# Altium PCB PCB.PcbDoc
Units mil, origin at the board's own origin, x right, y up, seen from the top; angles counter-clockwise.
Board outline 2045 x 1355 mil, 4 copper layers (Top Layer, Layer 1, Layer 2, Bottom Layer), stack 60.91 mil thick; 44 components, 32 nets, 142 pads, 72 vias.
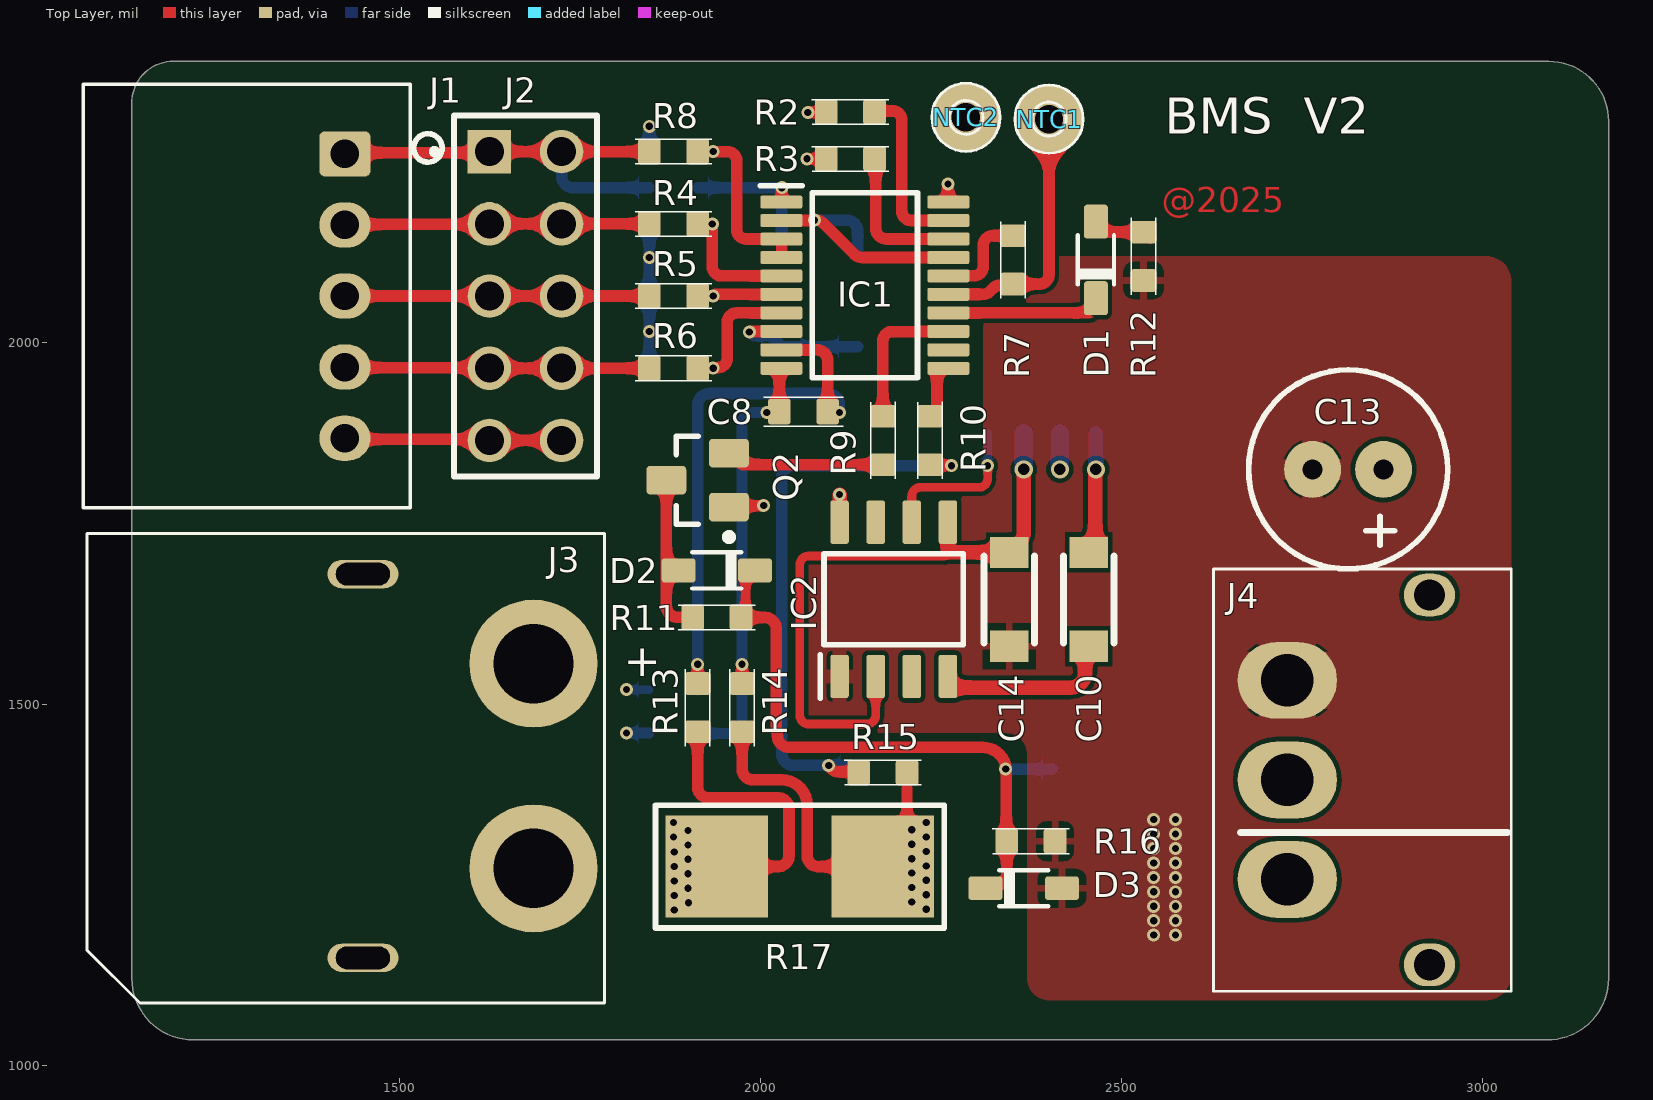
[diagram p0: Top Layer view]
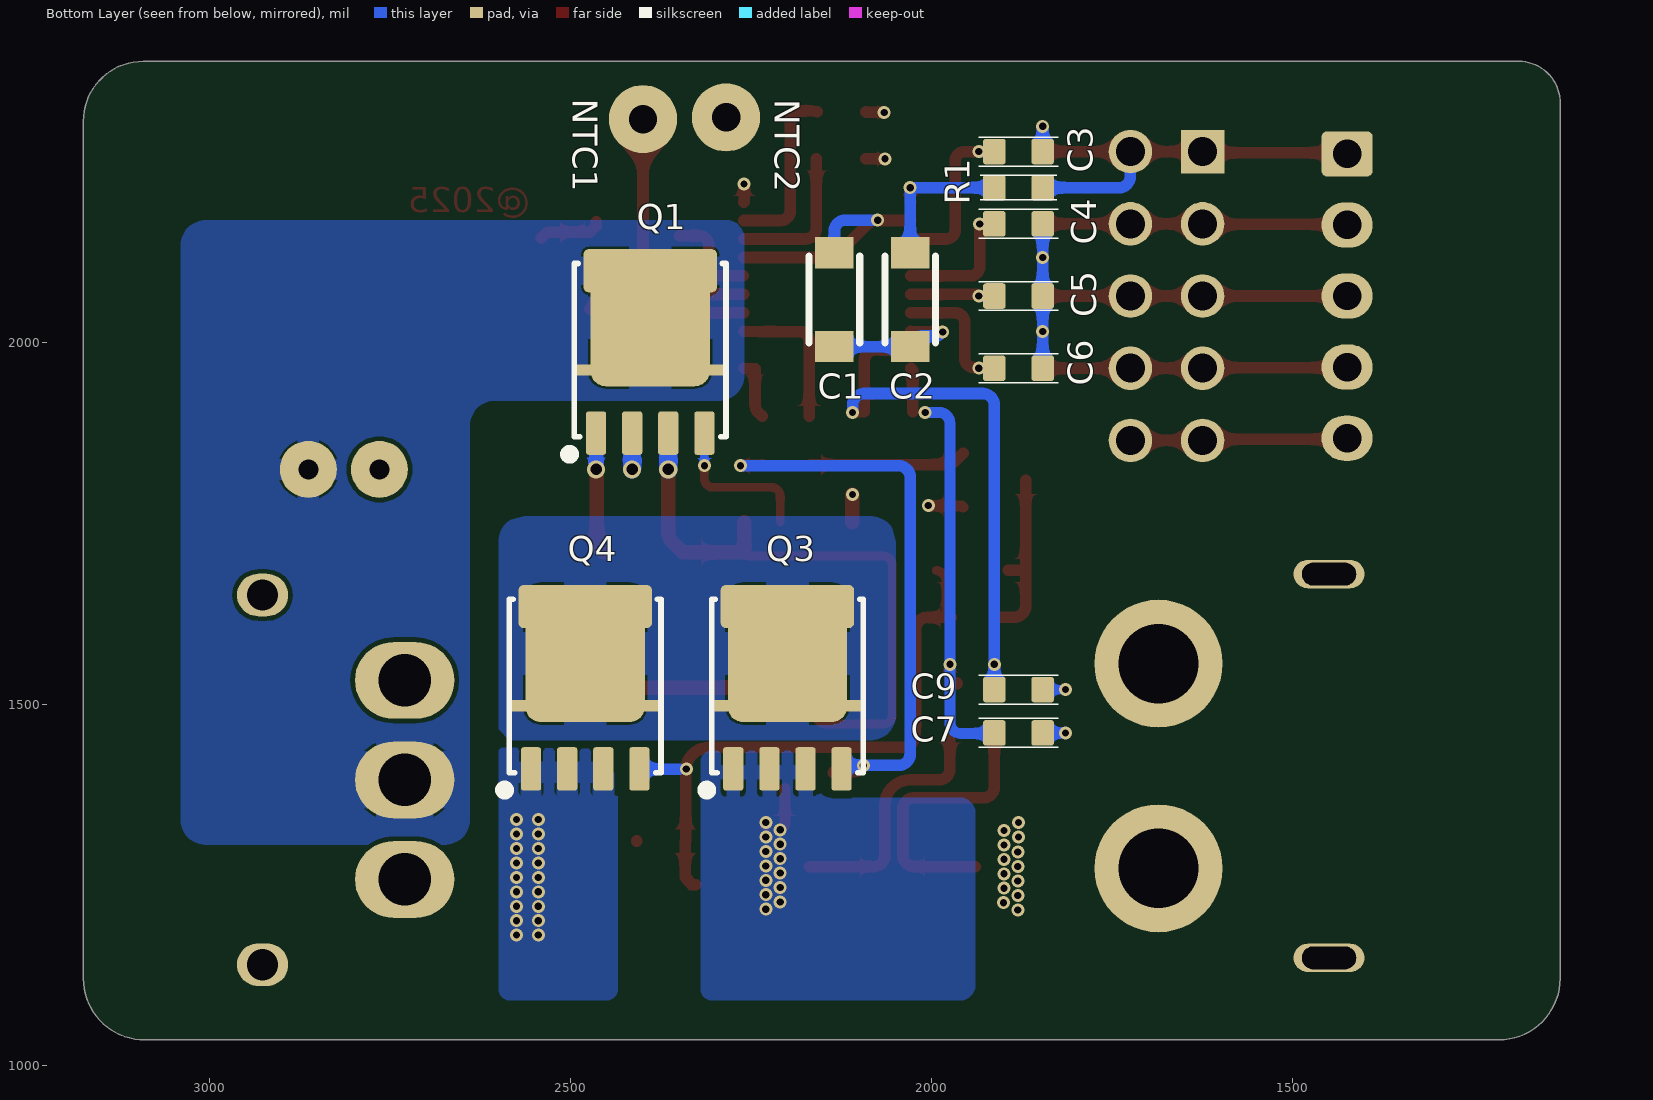
[diagram p1: Bottom Layer view, seen from below]
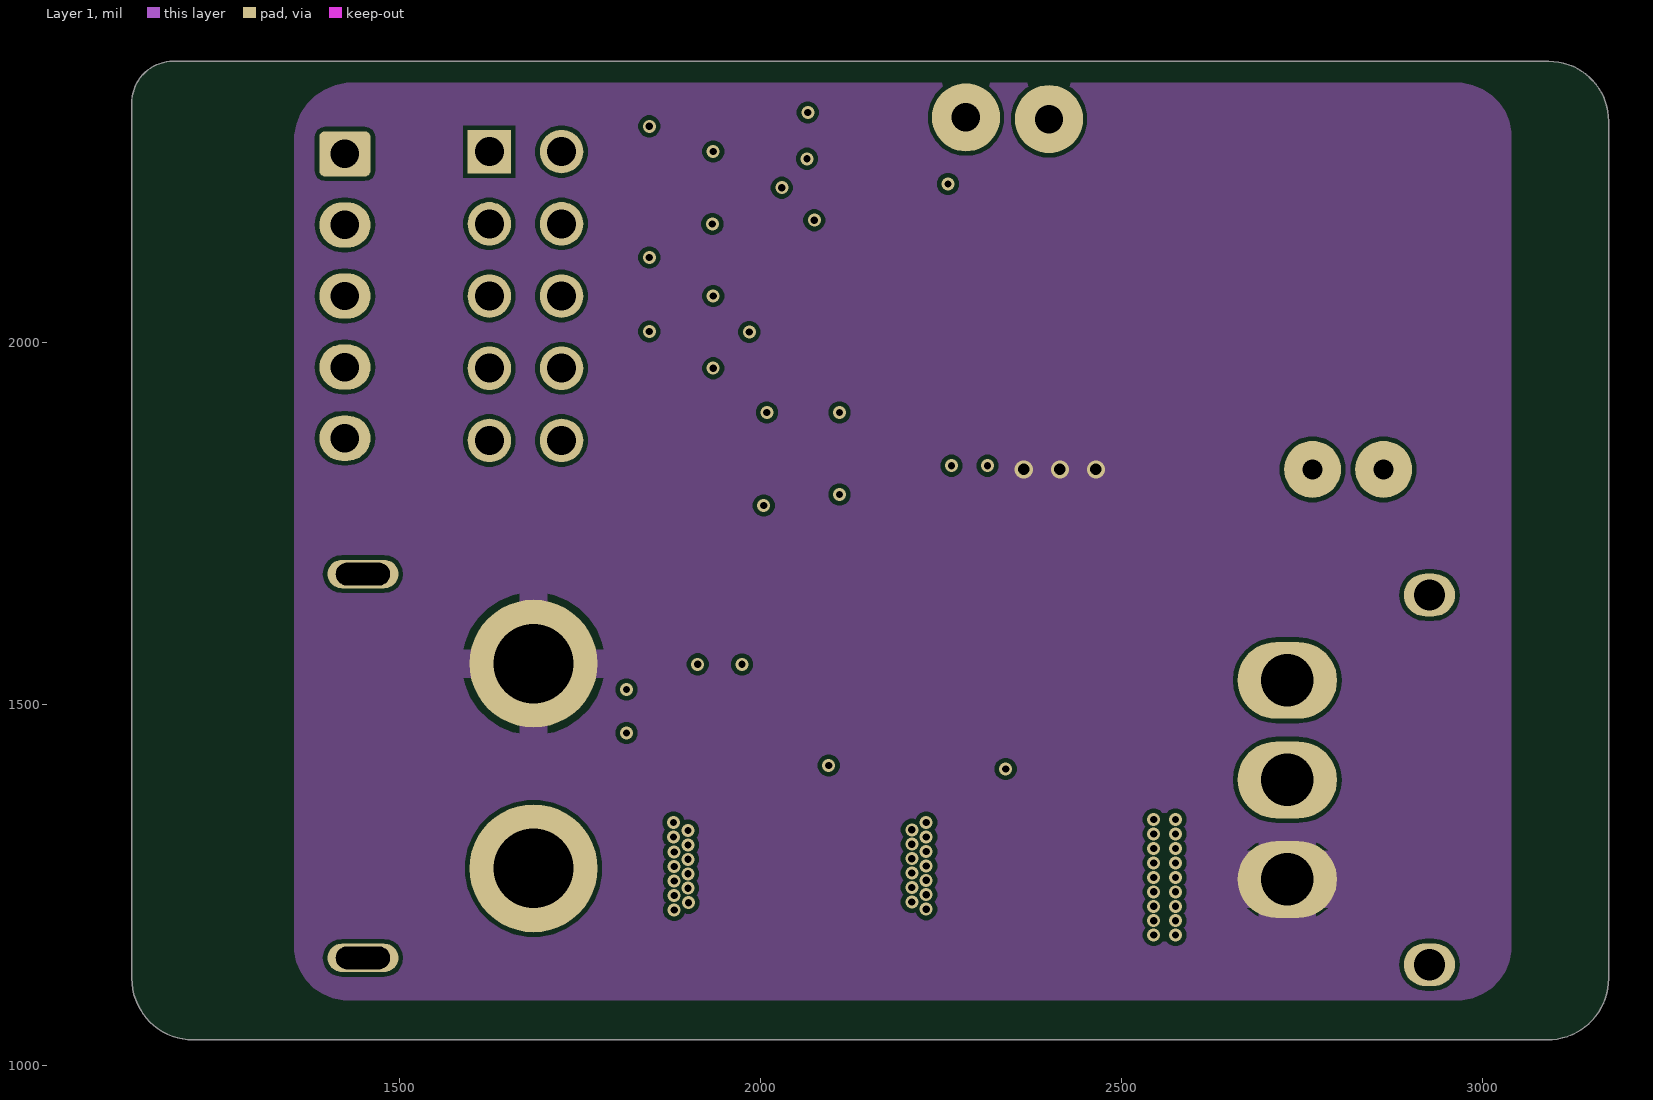
[diagram p2: Layer 1]
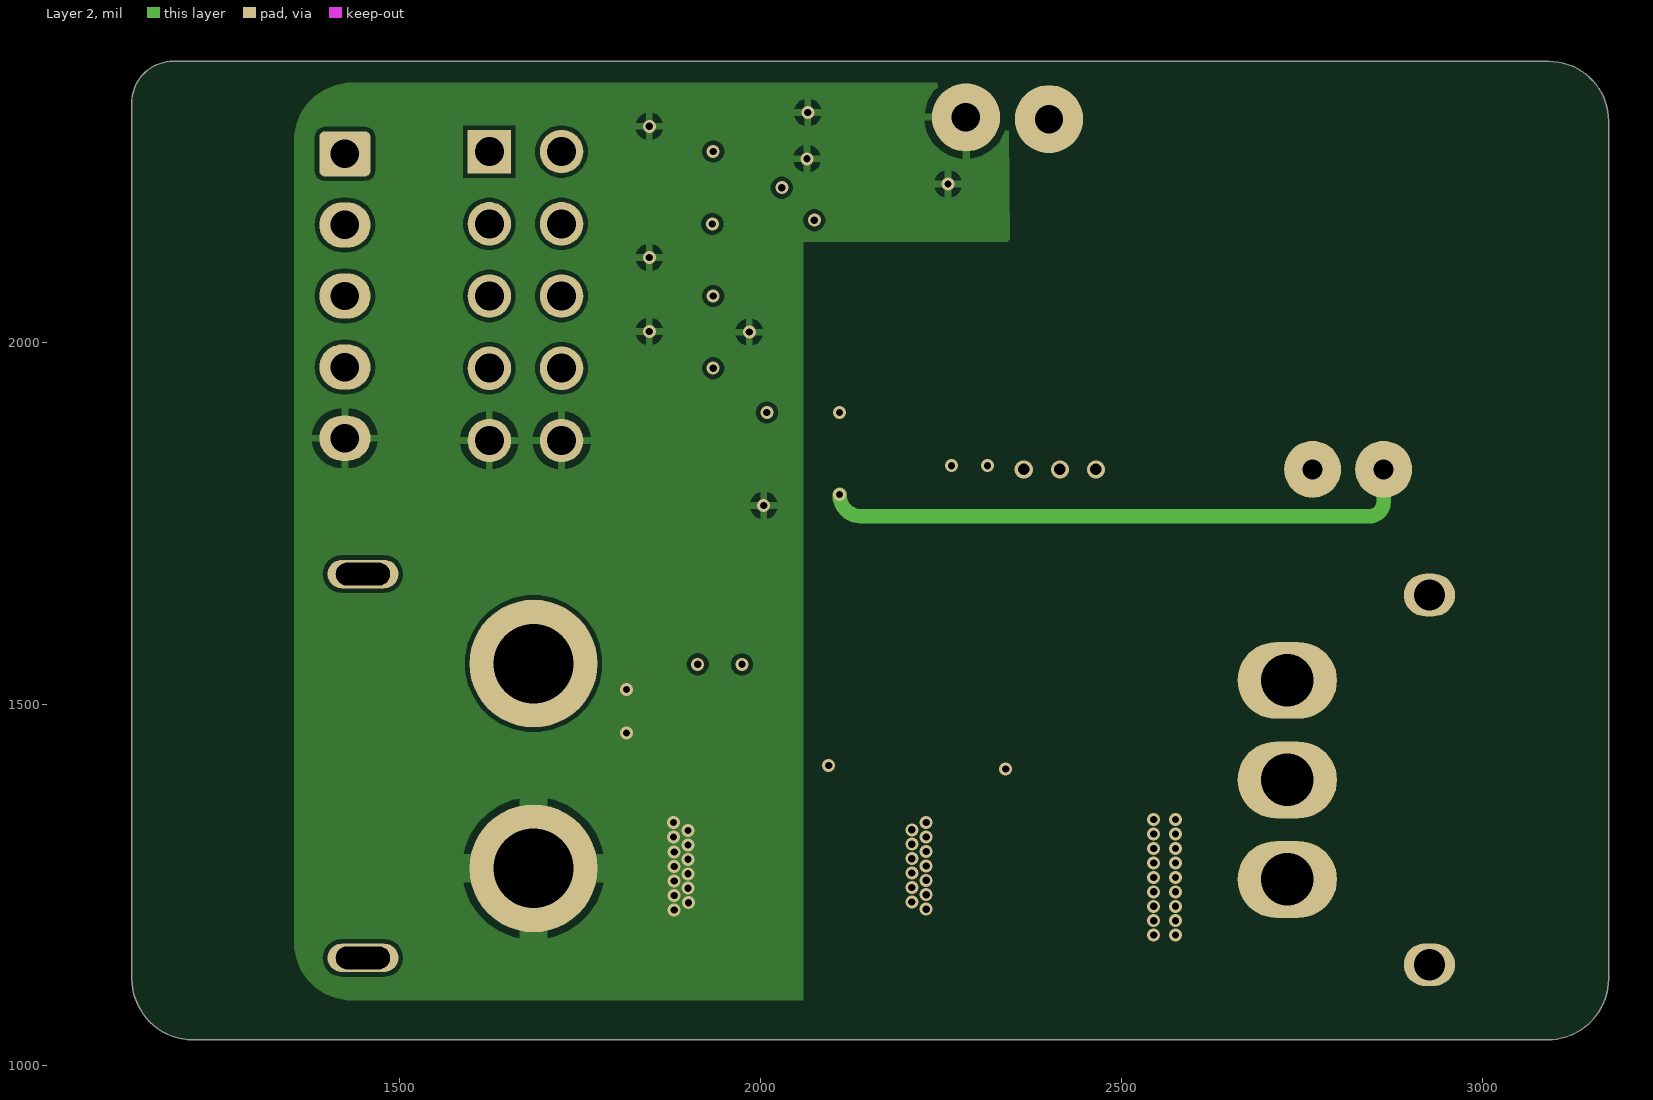
[diagram p3: Layer 2]
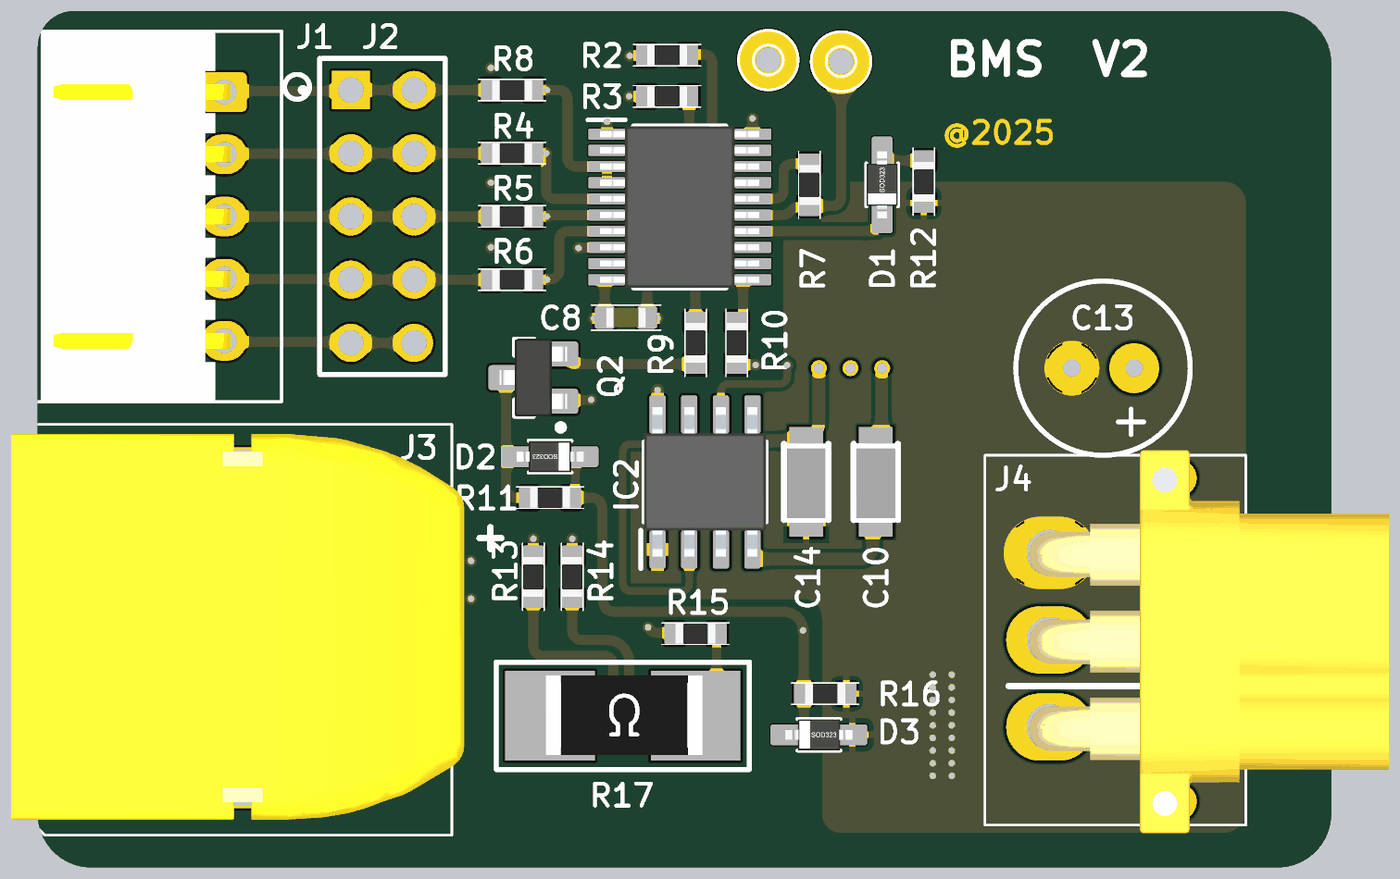
[diagram p4: 3D render of the assembled board from above, using the file's embedded part models]
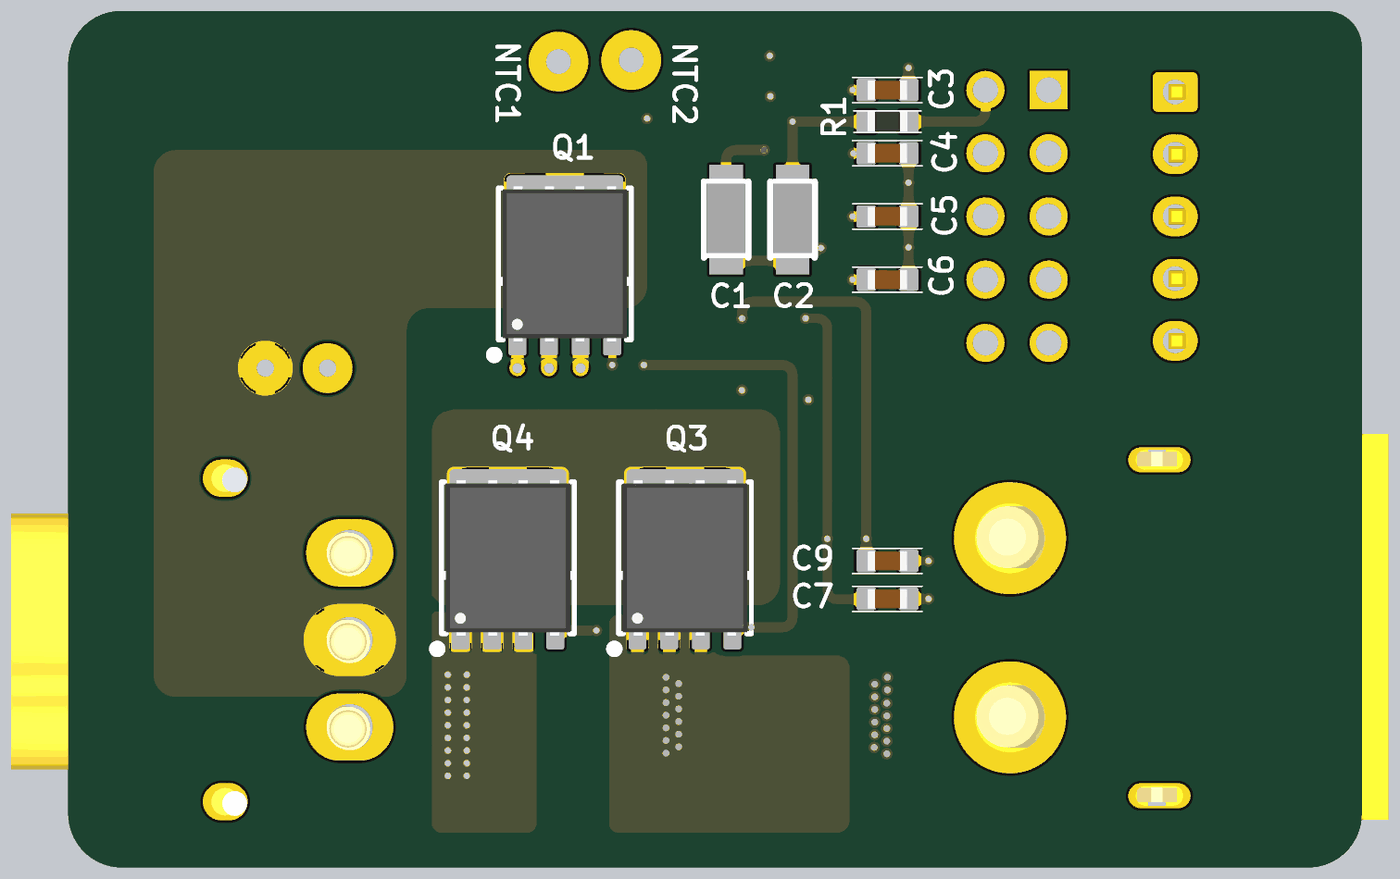
[diagram p5: 3D render of the assembled board from below, using the file's embedded part models]

## Layer stack, top to bottom
Top Solder: solder mask 0.4, Solder Resist, Dk 3.7
Top Layer: signal copper 1.4
Dielectric 2: prepreg 2.7165, PP-006, Dk 4.3
Dielectric 4: prepreg 2.7165, PP-006, Dk 4.3
Layer 1: signal copper 1.378
Dielectric 1: dielectric 44.4882, FR-4, Dk 4.6
Layer 2: signal copper 1.378
Dielectric 5: prepreg 2.7165, PP-006, Dk 4.3
Dielectric 3: prepreg 2.7165, PP-006, Dk 4.3
Bottom Layer: signal copper 1.4
Bottom Solder: solder mask 0.4, Solder Resist, Dk 3.7

## Board outline
1215,1035 3090,1035 ccw(c3090,1120) 3175,1120 3175,2307.07 ccw(c3092.07,2307.07) 3092.07,2390 1187.27,2390 ccw(c1187.27,2332.73) 1130,2332.73 1130,1120 ccw(c1215,1120)

## Design rules (kind name [scope] priority, off if disabled: settings)
Clearance [All] p1: gap=6 ignorepadtopadclearanceinfootprint=FALSE
HoleSize [All] p1: absolutevalues=TRUE maxlimit=100 minlimit=10 maxpercent=80.000 minpercent=20.000
MinimumSolderMaskSliver [All] p1: minsoldermaskwidth=3
PolygonConnect [All] p1: connectstyle=Relief reliefconductorwidth=10 reliefentries=4 polygonreliefangle="90 Angle" airgapwidth=10
RoutingVias [All] p1: holewidth=28 width=50 viastyle="Through Hole" minholewidth=28 minwidth=50 maxholewidth=28 maxwidth=50
SilkToSilkClearance [All] p1: silktosilkclearance=5
SilkToSolderMaskClearance [IsPad] p1: minsilkscreentomaskgap=3 clearancetoexposedcopper=TRUE
SolderMaskExpansion [All] p1: expansion=4 istentingtop=FALSE
Width [All] p1: maxlimit=75 minlimit=5 preferedwidth=12
26 further rules are at their usual default settings.

## Components (designator, comment, footprint, x,y, rotation, side; value= is the part's Value field where it differs from the comment)
C1 "C1206C105K5RACTU" C3216_Commercial 2135,2060 r270 bottom value=1u
C2 "C1206C105K5RACTU" C3216_Commercial 2030,2060 r270 bottom value=1u
C3 "06035C104K4Z2A" C0603 1880,2265 r0 bottom value=100n
C4 "06035C104K4Z2A" C0603 1880,2165 r0 bottom value=100n
C5 "06035C104K4Z2A" C0603 1880,2065 r0 bottom value=100n
C6 "06035C104K4Z2A" C0603 1880,1965 r0 bottom value=100n
C7 "06035C104K4Z2A" C0603 1880,1520 r0 bottom value=100n
C8 "06035C104K4Z2A" C0603 2060,1905 r180 top value=100n
C9 "06035C104K4Z2A" C0603 1880,1460 r180 bottom value=100n
C10 "C1206C105K5RACTU" C3216_Commercial 2455,1645 r90 top value=1u
C13 "EEUFC1V470" EEUFC 2863.43,1825 r180 top value=47uF/35V
C14 "C1206C105K5RACTU" C3216_Commercial 2345,1645 r90 top value=1u
D1 "NRVB0540T1G" SOD323 2465,2115 r270 top
D2 "NRVB0540T1G" SOD323 1940,1685 r0 top
D3 "PDZ15B,115" SOD323 2365,1245 r180 top value=15V
IC1 "BQ7790521PW" SOP65P640X120-20N 2145,2080 r0 top
IC2 "LM74700D-Q1" SOIC127P600X175-8N 2185,1645 r90 top
J1 "S5B-XH-A(LF)(SN)" JST_S5B-XH-A(LF)(SN) 1425,2065 r270 top
J2 "HTSW-105-08-TM-D" SAMTEC_HTSW-105-08-TM-D 1675,2065 r270 top
J3 "XT60-PCB-M" XT60-PCB-M 1686.22,1555.98 r0 top
J4 "MR30PW-FB" MR30PW-FB 2730,1257.2 r180 top
NTC1 "TP" "Pad0.8mm MPoint big" 2400,2310 r90 top
NTC2 "TP" "Pad0.8mm MPoint big" 2285,2312.38 r90 top
Q1 "BSC077N12NS3 G" Power56_LFPAK 2390,1990 r180 bottom
Q2 "FDV304P" FAIR-SOT23-3_V 1913.46,1810 r180 top
Q3 "BSC077N12NS3 G" Power56_LFPAK 2200,1525 r180 bottom
Q4 "BSC077N12NS3 G" Power56_LFPAK 2480,1525 r180 bottom
R1 "ERJ-3EKF1002V" R0603 1880,2215 r180 bottom value=1K
R2 "CR0603-J/-000ELF" R0603 2125,2320 r0 top value=0R
R3 "CR0603-J/-000ELF" R0603 2125,2255 r0 top value=0R
R4 "ERJ-3EKF1002V" R0603 1880,2165 r180 top value=1K
R5 "ERJ-3EKF1002V" R0603 1880,2065 r180 top value=1K
R6 "ERJ-3EKF1002V" R0603 1880,1965 r180 top value=1K
R7 "CRGP0603F10K" R0603 2350,2115 r270 top value=10K
R8 "ERJ-3EKF1002V" R0603 1880,2265 r180 top value=1K
R9 "RC0603FR-074K7L" R0603 2170,1865 r270 top value=4K7
R10 "RC0603FR-074K7L" R0603 2235,1865 r270 top value=4K7
R11 "RC0603JR-071ML" R0603 1940,1620 r0 top value=1M
R12 "CRGCQ0603F470K" R0603 2530.91,2120 r270 top value=470K
R13 "RC0603FR-07100RL" R0603 1913.52,1495 r270 top value=100R
R14 "RC0603FR-07100RL" R0603 1975,1495 r270 top value=100R
R15 "RC0603JR-071ML" R0603 2170,1405 r0 top value=1M
R16 "RC0603JR-071ML" R0603 2375,1310 r0 top value=1M
R17 "GMR100HTBFMR033" Shunt_2512 2055,1275 r0 top value=0R033

## Footprints (in the part's own frame and the unit in brackets; to place one, negate y for a bottom-side part, rotate by r counter-clockwise, add the part's x,y. Pads: shape width x height; smd on the part's side, far side on the other; paste and mask are expansions set on the pad)
C0603 [mm]
  rrect25% 0.8x0.9 smd: 1(-0.85,0) 2(0.85,0)
  silkscreen extent -1.4,-0.51 1.4,0.51, body extent -0.8,-0.4 0.8,0.4, height 0.6
C3216_Commercial [mm]
  rect 1.1x1.35 smd: 1(-1.65,0) 2(1.65,0)
  silkscreen extent -1.52,-0.89 1.52,0.89, body extent -1.65,-0.8 1.55,0.8, height 1.6
EEUFC [mm]
  round 2 hole 0.7: 1(0,0) 2(2.5,0)
  silkscreen extent -2.25,-3.5 4.75,3.5
FAIR-SOT23-3_V [mm]
  rrect25% 1.4x1 smd: 1(-1.1,0.95) 2(-1.1,-0.95) 3(1.1,0)
  silkscreen extent -1.23,-1.55 0.75,2.12, body extent -1.35,-1.56 1.35,1.56, height 1.2
JST_S5B-XH-A(LF)(SN) [mm]
  rrect25% 1.59x1.8 hole 1: 1(-5,0)
  oval 1.59x1.8 hole 1: 2(-2.5,0) 3(0,0) 4(2.5,0) 5(5,0)
  silkscreen extent -7.45,-9.2 7.45,3.42, body extent -7.45,-7.37 7.45,0.25, height 5.75
MR30PW-FB [mm]
  oval 3.5x2.7 hole 1.85: 1(0,0) 2(0,-3.5) 3(0,-7)
  oval 1.8x1.5 hole 1.1: 5(-5,3) 5(-5,-10)
  silkscreen extent -7.87,-10.92 2.6,3.94, body extent -13.62,-11.13 0.83,4.27, height 5.3
"Pad0.8mm MPoint big" [mm]
  round 2.4 hole 1: 1(0,0)
  silkscreen extent -1.2,-1.2 1.2,1.2
Power56_LFPAK [mil]
  rrect25% 28x60 smd: 1(-75,-114.8) 2(-25,-114.8) 3(25,-114.8) 4(75,-114.8)
  rrect25% 208.66x15.75 smd paste-196.85 mask-196.85: 5(0,-27.5)
  rrect25% 165x190 smd paste+0 mask+4: 5(0,45)
  rrect25% 185x60 smd mask+4: 5(0,110)
  silkscreen extent -117,-149 105,120, body extent -103,-123 103,123, height 44
R0603 [mm]
  rrect25% 0.8x0.9 smd: 1(-0.85,0) 2(0.85,0)
  silkscreen extent -1.35,-0.43 1.35,0.43, body extent -0.8,-0.4 0.8,0.4, height 0.4
SAMTEC_HTSW-105-08-TM-D [mm]
  rect 1.53x1.53 hole 1.02: 01(-5.08,-1.27)
  round 1.53 hole 1.02: 02(-5.08,1.27) 03(-2.54,-1.27) 04(-2.54,1.27) 05(0,-1.27) 06(0,1.27) 07(2.54,-1.27) 08(2.54,1.27) 09(5.08,-1.27) 10(5.08,1.27)
  silkscreen extent -6.35,-3.3 6.35,2.51
Shunt_2512 [mm]
  rect 3.6x3.6 smd: 1(-2.921,0) 2(2.921,0)
  silkscreen extent -5.08,-2.16 5.08,2.16, body extent -3.09,-1.57 3.21,1.63, height 0.66
SOD323 [mil]
  rrect25% 47x33 smd paste+0 mask+2: 1(-53,0) 2(53,0)
  silkscreen extent -34,-25 34,25, body extent -53,-25 53,25, height 43
SOIC127P600X175-8N [mm]
  rrect25% 1.525x0.65 smd: 1(-2.712,1.905) 2(-2.712,0.635) 3(-2.712,-0.635) 4(-2.712,-1.905) 5(2.712,-1.905) 6(2.712,-0.635) 7(2.712,0.635) 8(2.712,1.905)
  silkscreen extent -3.47,-2.45 1.6,2.58, body extent -3,-2.45 3,2.45, height 1.75
SOP65P640X120-20N [mm]
  rrect25% 1.475x0.45 smd mask+0.051: 1(-2.938,2.925) 2(-2.938,2.275) 3(-2.938,1.625) 4(-2.938,0.975) 5(-2.938,0.325) 6(-2.938,-0.325) 7(-2.938,-0.975) 8(-2.938,-1.625) 9(-2.938,-2.275) 10(-2.938,-2.925) 11(2.938,-2.925) 12(2.938,-2.275) 13(2.938,-1.625) 14(2.938,-0.975) 15(2.938,-0.325) 16(2.938,0.325) 17(2.938,0.975) 18(2.938,1.625) 19(2.938,2.275) 20(2.938,2.925)
  silkscreen extent -3.67,-3.25 1.85,3.5, body extent -3.2,-3.25 3.2,3.25, height 1.13
XT60-PCB-M [mm]
  round 4.5 hole 2.8: 1(0,0) 2(0,-7.2)
  oval 2.5x1 hole 0.8 slot 1.9 at 0 deg: 3(-6,-10.35) 4(-6,3.15)
  silkscreen extent -15.7,-11.94 2.5,4.57, body extent -15.2,-11.31 3,4.19, height 8.41

## Part data
C1 C2 C10 C14: library part CC_1206_X7R_105, "Ceramic Capacitor X7R 50V", Supplier Part Number 1=81-GCJ31MR71H105KA2L, Supplier 1=Mouser, Supplier 2=Digi-Key, Supplier 3=Farnell, Supplier Part Number 2=490-5810-1-ND, Supplier Part Number 3=2781416
C3 C4 C5 C6 C7 C8 C9: library part CC_0603_X7R_104, "Ceramic Capacitor X7R 50V", Manufacturer Part Number="100n/50V X7R C0603", Supplier Part Number 1=581-06035C104K4Z2A, Category="Capacitors CERA SMD", Component Type=Capacitors, Main=Capacitors, Part Number="100n/50V X7R C0603", SMD/THD=SMD, Status=A, Supplier 1=Mouser, Supplier 2=Farnell, Supplier Part Number 2=1833843
C13: library part EEUFC1V-470, "Low ESR Capacitor", Supplier Part Number 1=667-EEU-FC1V470, Category="Capacitors THT", Component Type=Capacitors, Main=Capacitors, SMD/THD=THT, Status=A, Supplier 1=Mouser, Supplier 2=Digi-Key, Supplier Part Number 2=P11232-ND
D1 D2: "Schottky Diode 40V, 500mA", Supplier Part Number 1=863-NRVB0540T1G, Category=Schottky, Main=Diodes, SMD/THD=SMD, Status=A, Supplier 1=Mouser, Supplier 2=Farnell, Supplier Part Number 2=2723913
D3: "Zener Diode 15V, 400mW", Supplier Part Number 1=771-PDZ15B-T/R, Category=Zener, Main=Diodes, SMD/THD=SMD, Status=A, Supplier 1=Mouser, Supplier 2=Farnell, Supplier 3=TME, Supplier Part Number 2=1757852, Supplier Part Number 3=PDZ15B.115
IC1: "3- to 5-series Li-Ion stackable battery protector", Manufacturer_Name="Texas Instruments", Mouser Part Number=595-BQ7790521PW, Supplier Part Number 1=595-BQ7790521PWR, Datasheet Link=https://www.ti.com/lit/ds/symlink/bq77905.pdf?ts=1621687207060&ref_url=https%253A%252F%252Fwww.ti.com%252Fstore%252Fti%252Fen%252Fp%252Fproduct%252F%253Fp%253DBQ7790521PW, Height=1.2mm, Manufacturer_Part_Number=BQ7790521PW, Mouser Price/Stock=https://www.mouser.co.uk/ProductDetail/Texas-Instruments/BQ7790521PW?qs=bAKSY%2FctAC4iC2ww%2F8Jy9A%3D%3D, Supplier 1=Mouser, Supplier 2=Digi-Key, Supplier 3="Texas Instruments", Supplier Part Number 2=296-BQ7790521PWRCT-ND, Supplier Part Number 3=BQ7790521PWR
IC2: "Reverse Battery Protection Ideal Diode Controller"
J1: "Connector Header Through Hole, Right Angle 5 position 0.098 _2.50mm_", Package=None, Availability=Unavailable, MF="JST Sales", MP=S5B-XH-A_LF__SN_, Price=None, SnapEDA_Link=https://www.snapeda.com/parts/S5B-XH-A%28LF%29%28SN%29/JST%20Sales%20America%20Inc./view-part/494428/?ref=snap
J2: "HEADER, 10 CONTACTS, 2 ROWS, THROUGH HOLE, 2.54 MM; Connector Systems:Board-to-Board; Pitch Spacing:2.54mm; No. of Rows:2Rows; No. of Contacts:10Contacts; Contact Termination Type:Through Hole; Product Range:HTSW Series RoHS Compliant: Yes", Package=None, Availability="In Stock", Check_prices=https://www.snapeda.com/parts/HTSW10508TMD/Samtec/view-part/?ref=eda, MF=Samtec, MP=HTSW10508TMD, Price=None, SnapEDA_Link=https://www.snapeda.com/parts/HTSW10508TMD/Samtec/view-part/?ref=snap
J3: "XT60 Connector", Manufacturer_Name=Amass, Manufacturer_Part_Number=XT30PB, Datasheet Link=https://www.tme.eu/Document/4acc913878197f8c2e30d4b8cdc47230/XT30UPB%20SPEC.pdf, Height=10.7mm
J4: "Connector", Supplier 1=TME, Supplier Part Number 1=MR30PW-FB
NTC1 NTC2: library part TP_PCB, "Test Point", Category=Pads_Pins_Measure_Points, Component Type=Mechanical, Main=Mechanical, Stock number=--------
Q1 Q3 Q4: "Single N-Channel 120V, 98A, 7.7mOhm", Manufacturer=Infineon, Manufacturer Part Number=BSC077N12NS3G, Supplier Part Number 1=726-BSC077N12NS3GATM, Category=N-MOS, Component Type=Transistors, ComponentLink1Description=Datasheet, ComponentLink1URL=http://datasheet.octopart.com/BSC077N12NS3-G-Infineon-datasheet-62293626.pdf, Main=Transistors, Part Number="BSC077N12NS3 G", SMD/THD=SMD, Status=A, Supplier 1=Mouser, Supplier 2=Digi-Key, Supplier Part Number 2=BSC077N12NS3GATMA1CT-ND
Q2: "P-Channel Digital FET, -25 V, -0.46 A, 0.35 W, -55 to 150 degC, 3-Pin SOT-23, -55 to 150 degC, RoHS, Tape and Reel", Manufacturer="ON Semiconductor / Fairchild", Maximum Continuous Drain Current=0.46A, Maximum Drain Source Voltage=25V, Maximum Gate Source Voltage=8V, Operating Temperature=-55to150°C, Package=3SOT-23, Package Description="3-Pin Small Outline Transistor, Body 2.92 x 1.325 mm, Pitch 0.95 mm", Package Reference=SOT23-3, Package Version="Rev. 12, 03/2016", Supplier Part Number 1=FDV304PCT-ND, Category=MOSFET, Channel Mode=Enhancement, Channel Type=P, Datasheet URL=https://www.fairchildsemi.com/datasheets/FD/FDV304P.pdf, Datasheet Version="Rev. E1, 08/1997", Manufacturer Part Number=FDV304P, Manufacturer URL=https://www.fairchildsemi.com/, Mounting=SurfaceMount, Mounting Technology=SurfaceMount, Package URL=http://www.fairchildsemi.com/dwg/MA/MA03D.pdf, Packaging=Tape&Reel, Rad Hard=No, RDS-on=1100@4.5VmOhm, Supplier 1=Digi-Key, Supplier 2=Digi-Key, Supplier Part Number 2=FDV304PDKR-ND, Typical Fall Time=35ns, Typical Rise Time=8ns, Typical Turn-Off Delay Time=55ns, Typical Turn-On Delay Time=6ns
R1 R4 R5 R6 R8: library part CR_0603_102, "Resistor 1%, 0.1W, 75V", Supplier Part Number 1=667-ERJ-3EKF1002V, Category="Resistors SMD", Component Type=Resistors, Main=Resistors, SMD/THD=SMD, Status=A, Supplier 1=Mouser, Supplier 2=Digi-Key, Supplier 3=Farnell, Supplier Part Number 2=P10.0KHCT-ND, Supplier Part Number 3=2303192
R2 R3: library part CR_0603_ZERO, "Resistor Jumper", Supplier Part Number 1=652-CR0603-J/-000ELF, Category="Resistors SMD", Component Type=Resistors, Main=Resistors, SMD/THD=SMD, Status=A, Supplier 1=Mouser
R7: library part CR_0603_103, "Resistor 1%, 0.1W, 75V", Supplier Part Number 1=279-CRGP0603F10K, Category="Resistors SMD", Component Type=Resistors, Main=Resistors, SMD/THD=SMD, Status=A, Supplier 1=Mouser, Supplier 2=Digi-Key, Supplier 3=Farnell, Supplier Part Number 2=A130428CT-ND, Supplier Part Number 3=2861046
R9 R10: library part CR_0603_472, "Resistor 1%, 0.1W, 75V", Supplier Part Number 1=603-RC0603FR-074K7L, Category="Resistors SMD", Component Type=Resistors, Main=Resistors, SMD/THD=SMD, Status=A, Supplier 1=Mouser, Supplier 2=Farnell, Supplier 3=TME, Supplier Part Number 2=9238565, Supplier Part Number 3=RC0603FR-074K7
R11 R15 R16: library part CR_0603_105, "Resistor 1%, 0.1W, 75V", Manufacturer Part Number="1M0 R0603", Supplier Part Number 1=603-RC0603JR-071ML, Category="Resistors SMD", Component Type=Resistors, Main=Resistors, Part Number="1M0 R0603", SMD/THD=SMD, Status=A, Supplier 1=Mouser, Supplier 2=TME, Supplier 3=Digi-Key, Supplier Part Number 2=RC0603JR-071M, Supplier Part Number 3=311-1.0MGRCT-ND
R12: library part CR_0603_474, "Resistor 1%, 0.1W, 75V", Supplier Part Number 1=279-CRGCQ0603F470K, Category="Resistors SMD", Component Type=Resistors, Main=Resistors, SMD/THD=SMD, Status=A, Supplier 1=Mouser, Supplier 2=Digi-Key, Supplier 3=TME, Supplier Part Number 2=A129720CT-ND, Supplier Part Number 3=CRGCQ0603F470K
R13 R14: library part CR_0603_101, "Resistor 1%, 0.1W, 75V", Supplier Part Number 1=603-RC0603FR-07100RL, Category="Resistors SMD", Component Type=Resistors, Main=Resistors, SMD/THD=SMD, Status=A, Supplier 1=Mouser, Supplier 2=Farnell, Supplier 3=TME, Supplier Part Number 2=9238360, Supplier Part Number 3=RC0603FR-07100R
R17: library part SHUNT_2512_0R033, "Current Sense Resistor 1%, 3W, AEC-Q200", Supplier Part Number 1=755-GMR100HTBFMR033, Category="Resistors SMD", Component Type=Resistors, Main=Resistors, SMD/THD=SMD, Status=A, Supplier 1=Mouser, Supplier 2=Digi-Key, Supplier 3=Farnell, Supplier Part Number 2=511-1690-1-ND, Supplier Part Number 3=2808333

## Via types
v1: diameter 18, hole 10, Top Layer to Bottom Layer, tented both sides, 69 vias
v2: diameter 25, hole 16, Top Layer to Bottom Layer, 3 vias

## Nets (pads, with @x,y where several pads share a name; then routed paths per layer and width w, separated by ;. In a path a pad name is that pad's centre, name@x,y a point inside that pad or via, vN(x,y) a via of type N, cw(c..) or ccw(c..) an arc to the next point about the centre after c; other vN are vias at no path point)
GND: C1.2 C2.2 C3.1 C4.1 C5.1 C6.1 C7.1 C9.2 IC1.8 IC1.20 J1.5 J2.09 J2.10 J3.2 NTC2.1 Q2.1 R2.1 R3.1 R13.2 R17.1 | length 1322.9
  Top Layer w15: Q2.1 1958.6,1774.43 2004.43,1774.43 v1(2005,1775)
  Top Layer w16: J1.5 1426.57,1866.57 1623.43,1866.57 J2.09 J2.10 ; R13.2 1913.52,1385 ccw(c1928.52,1385) 1928.52,1370 2025,1370 cw(c2025,1355) 2040,1355 2040,1290 cw(c2025,1290) 2025,1275 R17.1 ; v1(1985,2015) 1985.79,2015.79 2029.1,2015.79 IC1.8 ; v1(2065,2255) R3.1 ; v1(2065.96,2319.12) 2066.4,2319.56 2091.1,2319.56 R2.1 ; v1(2260,2220) 2260,2195.83 IC1.20
  Bottom Layer w12: v1(1815,1520.03) C7.1
  Bottom Layer w15: v1(1815,1460) C9.2
  Bottom Layer w16: C6.1 v1(1846.54,2016.02) C5.1 v1(1846.54,2118.39) C4.1 ; C3.1 v1(1846.54,2300) ; v1(1985,2015) 1986.35,2015 1991.16,2010.19 2014.85,2010.19 C2.2 C1.2
  other v1: 1880.94,1214.96 1900.94,1224.96 1880.94,1234.96 1900,1245 1880.94,1254.96 1900,1265 1880.94,1274.96 1900,1285 1880.94,1294.96 1900,1305 1880,1315.93 1900,1325 1880,1335.93
GND_BAT: C13.2 C14.1 D3.1 IC2.1 J4.3 Q4.1 Q4.2 Q4.3 R12.2 R16.2 | length 0.5
  Top Layer w16: R16.2 R16.2@2408.8,1310.34
  other v1: 2545,1180 2575,1180 2545,1200 2575,1200 2545,1220 2575,1220 2545,1240 2575,1240 2545,1260 2575,1260 2545,1280 2575,1280 2545,1300 2575,1300 2545,1320 2575,1320 2545,1340 2575,1340
NetC1_1: C1.1 IC1.2 IC1.17 | length 350.2
  Top Layer w16: IC1.2 2074.57,2169.57 v1(2075,2170) 2077.17,2170 cw(c2077.17,2155) 2087.74,2165.65 2130.61,2122.77 ccw(c2141.21,2133.39) 2141.21,2118.39 IC1.17
  Bottom Layer w16: v1(2075,2170) 2120,2170 cw(c2120,2155) 2135,2155 C1.1
NetC2_1: C2.1 IC1.1 R1.1 | length 226.7
  Top Layer w16: IC1.1 2030,2195.83 v1(2030,2215)
  Bottom Layer w16: R1.1 v1(2030,2215) C2.1
NetC3_2: C3.2 IC1.3 IC1.4 R8.1 | length 264.2
  Top Layer w16: R8.1 v1(1935,2265) 1954.53,2265 cw(c1954.53,2252) 1967.53,2252.05 1967.53,2156.93 ccw(c1980.53,2156.98) 1980.48,2143.98 IC1.3 ; IC1.4 2030,2119.06 2030,2135
  Bottom Layer w16: C3.2 v1(1935,2265)
NetC4_2: C4.2 IC1.5 R4.1 | length 202.7
  Top Layer w16: R4.1 1931.47,2165 cw(c1931.47,2150) v1(1933.8,2164.82) 1933.8,2105.8 ccw(c1946.8,2105.8) 1946.8,2092.8 IC1.5
  Bottom Layer w16: C4.2 1913.56,2164.91 1933.71,2164.91 v1(1933.8,2164.82)
NetC5_2: C5.2 IC1.6 R5.1 | length 138.3
  Top Layer w16: R5.1 v1(1935,2065) 1936.35,2065 1938.56,2067.2 IC1.6
  Bottom Layer w16: C5.2 v1(1935,2065)
NetC6_2: C6.2 IC1.7 R6.1 | length 202.3
  Top Layer w16: R6.1 v1(1935,1965) 1935.96,1965.96 1941.53,1965.96 ccw(c1941.53,1978.96) 1954.53,1978.96 1954.53,2028.61 cw(c1967.53,2028.61) 1967.53,2041.61 IC1.7
  Bottom Layer w16: C6.2 v1(1935,1965)
NetC7_2: C7.2 C8.1 IC1.9 R13.1 | length 805.1
  Top Layer w16: R13.1 v1(1913.52,1555) ; IC1.9 2078.46,1990.43 cw(c2078.46,1975.43) 2093.46,1975.43 C8.1 v1(2110,1903.71)
  Bottom Layer w16: C7.2 v1(1913.52,1555) ; v1(1913.52,1555) 1913.52,1914 cw(c1929.52,1914) 1929.52,1930 2093.56,1930 cw(c2093.62,1914) 2100.77,1928.31 cw(c2093.62,1914) 2109.62,1914.06 2109.62,1914 2109.62,1904.1 v1(2110,1903.71)
NetC8_2: C8.2 C9.1 IC1.10 R14.1 | length 615.6
  Top Layer w16: R14.1@1965,1528.46 R14.1@1965.77,1529.23 ; R14.1 v1(1975,1554.97) ; C8.2 2026.54,1962.48 2028.89,1964.84 IC1.10
  Bottom Layer w15: C9.1@1914.14,1459.33 1960.05,1459.33 ccw(c1960,1474.33) 1975,1474.33 1975,1888.77 cw(c1990,1888.77) 1990,1903.77 v1(2009.29,1903.77)
NetC10_1: C10.1 IC2.4 | length 253.6
  Top Layer w20: IC2.4 2262.8,1522.8 2430.06,1522.8 ccw(c2430,1542.8) 2450,1542.8 2450,1575.04 C10.1
NetC10_2: C10.2 C14.2 IC2.2 IC2.5 J3.1 J4.1 Q1.1 Q1.2 Q1.3 | length 1113.7
  Top Layer w12: IC2.2 2160,1484.3 cw(c2148,1484.3) 2148,1472.3 2067,1472.3 cw(c2067,1484.3) 2055,1484.3 2055,1692.98 cw(c2067,1692.98) 2067,1704.98 2255.01,1704.98 ccw(c2255.01,1716.98) 2263.5,1708.5 2264.96,1709.96
  Top Layer w20: 2260,1710 IC2.5 ; 2264.96,1709.96 C14.2 2359.14,1724.1 ccw(c2345,1738.24) 2365,1738.24 v2(2365,1825) ; C10.2 2464.04,1719 2464.04,1824.04 v2(2465,1825)
  Bottom Layer w20: v2(2465,1825) Q1.1
  Bottom Layer w25: v2(2365,1825) Q1.3 ; v2(2415,1825) Q1.2
NetC13_1: C13.1 IC2.8 J4.2 Q1.5 | length 865.4
  Top Layer w20: IC2.8 v1(2110,1790)
  Layer 2 w20: v1(2110,1790) ccw(c2139.45,1789.45) 2139.34,1760 ccw(c2139.45,1789.45) 2139.45,1760 2843.49,1760 ccw(c2843.43,1780) 2863.43,1780 C13.1
NetD1_1: D1.1 R12.1 | length 89.3
  Top Layer w16: D1.1 2465,2161.96 2473.5,2153.46 R12.1 2532.87,2153.46 2540.62,2145.72 R12.1@2540.62,2144.78
NetD1_2: D1.2 IC1.14 | length 234.1
  Top Layer w16: IC1.14 2451.61,2041.61 2465,2055 D1.2 D1.2@2473.5,2047
NetD2_1: D2.1 Q2.3 R11.1 | length 243.4
  Top Layer w16: Q2.3 D2.1@1870.16,1685 ; D2.1@1894,1685 D2.1 D2.1@1870.16,1685 ; R11.1 1886.16,1620 cw(c1886.16,1636) 1870.16,1636 D2.1@1870.16,1685
NetD2_2: D2.2 D3.2 Q4.4 R11.2 R16.1 | length 846.2
  Top Layer w13: R11.2 1976.19,1622.73 ccw(c1967,1631.92) 1980,1631.92 1980,1670.71 cw(c1993,1670.71) 1987.61,1682.54 D2.2
  Top Layer w16: R11.2 1980,1620 2006.32,1620 cw(c2006.32,1604) 2022.32,1604 2022.32,1471.07 ccw(c2110.85,1471.07) 2024.26,1452.68 2024.27,1452.62 ccw(c2039.91,1456) 2039.9,1440 2308.16,1440 cw(c2308.16,1407.04) 2340.73,1412.16 v1(2340,1410) 2340.77,1405.2 2340.77,1310.77 R16.1 2341.54,1260 2331.54,1250 D3.2@2327,1250
  Bottom Layer w16: 2350,1410 2404.8,1410 Q4.4
NetIC1_11: IC1.11 R10.1 | length 84.7
  Top Layer w16: R10.1 2240.25,1903.71 ccw(c2228.94,1915.03) 2244.94,1915.03 2244.94,1963.98 IC1.11
NetIC1_13: IC1.13 R9.1 | length 202.4
  Top Layer w16: R9.1 2170,2002.79 cw(c2183,2002.79) 2183,2015.79 2238.13,2015.79 IC1.13
NetIC1_15: IC1.15 NTC1.1 R7.2 | length 366.3
  Top Layer w16: IC1.15 2283.2,2067.44 2308.74,2067.44 ccw(c2308.74,2080.44) 2317.91,2071.22 2322.65,2075.96 cw(c2331.82,2066.74) 2331.82,2079.74 2338.78,2079.74 R7.2 2387,2081.54 ccw(c2387,2094.54) 2400,2094.54 NTC1.1
NetIC1_16: IC1.16 R7.1 | length 133.4
  Top Layer w16: IC1.16@2260.9,2093.03 2296.08,2093.03 ccw(c2296.08,2106.03) 2309.08,2106.03 2309.08,2135.46 cw(c2322.08,2135.46) 2322.08,2148.46 R7.1
NetIC1_18: IC1.18 R3.2 | length 205.3
  Top Layer w16: R3.2@2160,2255.01 2160,2158.98 ccw(c2175,2158.98) 2175,2143.98 IC1.18
NetIC1_19: IC1.19 R2.2 | length 243
  Top Layer w16: R2.2 2167.71,2321.39 2183.3,2321.39 cw(c2183.3,2308.39) 2196.3,2308.39 2196.3,2182.57 ccw(c2209.3,2182.57) 2209.3,2169.57 IC1.19
NetIC2_6: IC2.6 Q1.4 | length 218.1
  Top Layer w12: IC2.6 2210,1788.05 cw(c2222,1788) 2221.95,1800 2303,1800 ccw(c2303,1812) 2315,1812 v1(2315,1830)
  Bottom Layer w12: v1(2315,1830) Q1.4
NetJ1_1: J1.1 J2.01 J2.02 R1.2 R8.2 | length 587.5
  Top Layer w16: J1.1 1426.57,2263.43 1623.43,2263.43 J2.01 J2.02 R8.2
  Bottom Layer w16: J2.02 1725,2231 ccw(c1741,2231) 1741,2215 R1.2
NetJ1_2: J1.2 J2.03 J2.04 R4.2 | length 422.2
  Top Layer w16: J1.2 1425.79,2164.21 1624.21,2164.21 J2.03 J2.04 R4.2
NetJ1_3: J1.3 J2.05 J2.06 R5.2 | length 421.5
  Top Layer w16: J1.3 J2.05 J2.06 R5.2
NetJ1_4: J1.4 J2.07 J2.08 R6.2 | length 422.2
  Top Layer w16: J1.4 1425.79,1965.79 1624.21,1965.79 J2.07 J2.08 R6.2
NetQ2_2: Q2.2 R9.2 | length 217.1
  Top Layer w16: Q2.2 1967.95,1836.22 1967.99,1836.18 ccw(c1979.27,1847.54) 1979.27,1831.54 R9.2@2168.03,1831.54
"NetQ3_1, 2, 3": Q3.1 Q3.2 Q3.3 R14.2 R15.2 R17.2 | length 418.5
  Top Layer w15: 2203.46,1383.05 2203.46,1332.46 v1(2210,1325.93)
  Top Layer w16: R14.2 1975,1410 ccw(c1990,1410) 1990,1395 2029.96,1395 cw(c2029.96,1359.96) 2065,1360.09 2065,1360.04 2065,1289.95 ccw(c2080,1290) 2079.95,1275 R17.2 ; R17.2@2230,1330.9 v1(2230,1335.93)
  other v1: 2230,1215.93 2210,1225.93 2230,1235.93 2210,1245.93 2230,1255.93 2210,1265.93 2230,1275.93 2210,1285.93 2230,1295.93 2210,1305.93 2230,1315.93
NetQ3_4: Q3.4 R10.2 R15.1 | length 807.1
  Top Layer w16: v1(2095,1415) ccw(c2109.27,1422.23) 2109.21,1406.23 2132.7,1406.23 cw(c2132.7,1390.23) 2135.56,1405.98 R15.1 ; R10.2 2236.15,1830.38 2264.62,1830.38 v1(2265,1830)
  Bottom Layer w16: v1(2095,1415) Q3.4@2124.8,1415 ; v1@2095.12,1415.06 2045.94,1415.06 cw(c2046,1431.06) 2030,1431 2030,1814 cw(c2046,1814) 2046,1830 v1(2265,1830)
NetQ3_5: Q3.5 Q4.5
pads on no net: IC1.12 IC2.3 IC2.7 J3.3 J3.4 J4.5

## Polygon pours and split planes (outlines as drawn)
NetQ3_5 on Bottom Layer "NETQ3_5_L04_P000" (solid, pour order 0): 2085,1450 2585,1450 ccw(c2585,1465) 2600,1465 2600,1725 ccw(c2565,1725) 2565,1760 2085,1760 ccw(c2085,1725) 2050,1725 2050,1485 ccw(c2085,1485)
NetC13_1 on Bottom Layer "NETC13_1_L04_P007" (solid, pour order 7): 2260,2145 2260,1955 ccw(c2295,1955) 2295,1920 2605,1920 cw(c2605,1885) 2640,1885 2640,1340 ccw(c2675,1340) 2675,1305 3005,1305 ccw(c3005,1340) 3040,1340 3040,2135 ccw(c3005,2135) 3005,2170 2285,2170 ccw(c2285,2145)
GND_BAT on Bottom Layer "GND_BAT_L04_P002" (solid, pour order 2): 2435,1437.44 2600,1439.74 2600,1105 cw(c2585,1105) 2585,1090 2450,1090 cw(c2450,1105) 2435,1105
"NetQ3_1, 2, 3" on Bottom Layer "NETQ3_1,_2,_3_L04_P001" (solid, pour order 1): 2320,1105 2320,1420 ccw(c2305,1420) 2305,1435 2160,1435 2160,1390 cw(c2140,1390) 2140,1370 1960,1370 ccw(c1960,1350) 1940,1350 1940,1110 ccw(c1960,1110) 1960,1090 2305,1090 ccw(c2305,1105)
GND on Layer 2 "GND_L03_P005" (solid, pour order 5): 1435,2360 2060,2360 2343.88,2360 2345.85,2140 2060,2140 2060,1090 1435,1090 cw(c1435,1169.94) 1355.06,1169.94 1355.06,2280.06 cw(c1435,2280.06)
NetC10_2 on Layer 1 "NETC10_2_L02_P006" (solid, pour order 6): 1430,1090 2060,1090 2965,1090 ccw(c2965,1165) 3040,1165 3040,2285 ccw(c2965,2285) 2965,2360 1435,2360 ccw(c1435,2280) 1355,2280 1355,1165 ccw(c1430,1165)
GND_BAT on Top Layer "GND_BAT_L01_P004" (solid, pour order 4): 2308.74,2013.74 2308.74,1819.74 cw(c2284,1819.74) 2284,1795 2055,1795 2055,1460 2340,1460 cw(c2340,1430.11) 2369.89,1430.12 2369.99,1120 ccw(c2400,1120.01) 2400,1090 3005,1090 ccw(c3005,1125) 3040,1125 3040,2085 ccw(c3005,2085) 3005,2120 2415,2120 ccw(c2415,2013.75)

## Other copper
Top Layer:
  text "@2025" at 2556,2181 h35

## Silkscreen, mask and mechanical layers (free items; w line width, h text height)
Top Overlay:
  text "BMS  V2" at 2560,2290 h50
Top Solder:
  text "@2025" at 2556,2181 h35

## Text inside footprints (layer, text, board x,y; h text height)
J3: Top Overlay "+" at 1811.22,1538.49 h45